# Altium PCB iron_board_PCB.PcbDoc (part 2 of 2)
Units mil, origin at the board's own origin, x right, y up, seen from the top; angles counter-clockwise.
Board outline 1620 x 2202.72 mil, 4 copper layers (Top Layer, Mid Layer 1, Mid Layer 2, Bottom Layer), stack 61.811 mil thick; 72 components, 48 nets, 259 pads, 44 vias.
Unrouted connection lines stored in the file: 114.
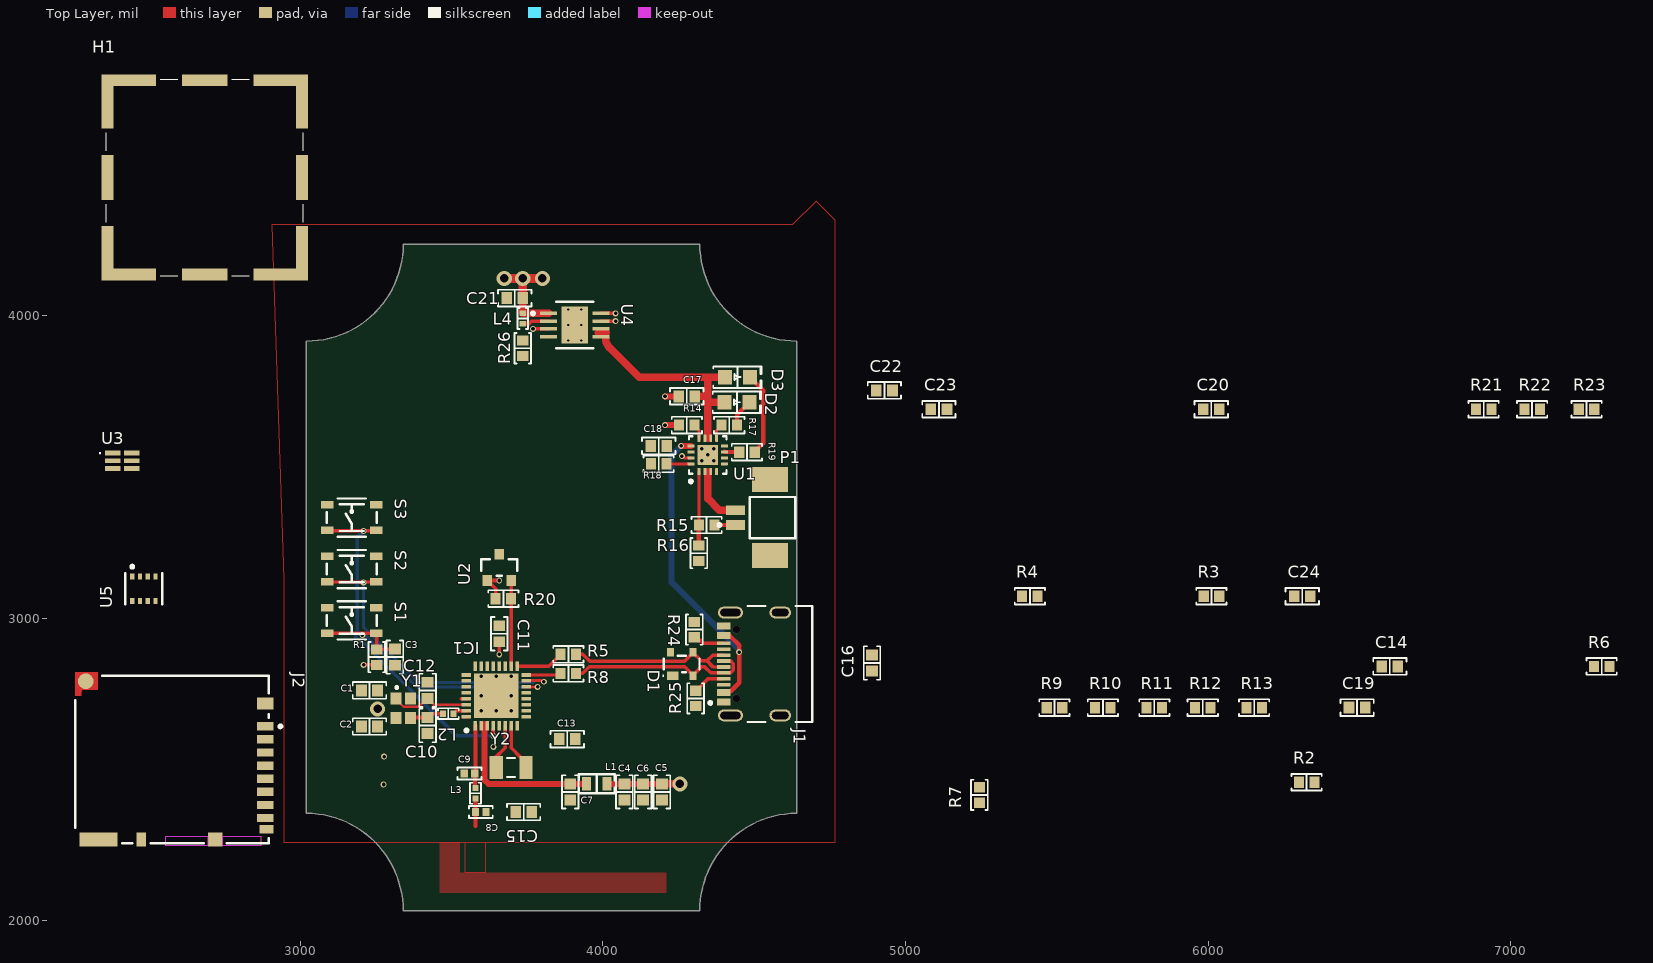
[diagram p0: Top Layer view]

## Via types
v1: diameter 19.68, hole 11.81, Top Layer to Bottom Layer, 33 vias
v2: diameter 19.68, hole 7.87, Top Layer to Bottom Layer, 6 vias
v3: diameter 50, hole 28, Top Layer to Bottom Layer, 5 vias

## Nets (pads, with @x,y where several pads share a name; then routed paths per layer and width w, separated by ;. In a path a pad name is that pad's centre, name@x,y a point inside that pad or via, vN(x,y) a via of type N, cw(c..) or ccw(c..) an arc to the next point about the centre after c; other vN are vias at no path point) (continued)
+4.2: (continued)
  Top Layer w25: 3984.61,3942.59 3985.02,3942.18 4011.28,3942.18 ; 4009.31,3923.2 ccw(c4051.68,3923.2) 4021.7,3893.26 4120,3794.96 4346.35,3794.96 ; C17.2 4346.35,3732.68 ; 4346.35,3594.24 4346.35,3713 ; D2.1 4346.35,3713 ; D3.1 4347.39,3796 4346.35,3794.96 ; 4346.35,3713 4346.35,3732.68 ; 4346.35,3732.68 4346.35,3794.96
CHIP_ENABLE: C14.2 IC1.4 R6.1 S3.3 S3.4 | length 1141.8
  Top Layer w12: S3.3 3089.29,3288.69 3208.39,3288.69 v1(3209.37,3287.71) 3210.35,3288.69 3250.71,3288.69 S3.4 ; v1(3637.58,2610.46) IC1.4@3637.58,2634.72
  Bottom Layer w12: v1(3209.37,3287.71) 3187.62,3265.96 3187.62,2956.72 3183.31,2952.4 3183.31,2934.39 3196.05,2921.65 3204.67,2921.65 3515.86,2610.46 v1(3637.58,2610.46)
GND: C1.1 C2.1 C3.1 C4.2 C5.1 C6.1 C7.1 C8.1 C8.2 C9.1 C10.2 C11.1 C12.2 C13.1 C14.1 C15.2 C16.2 C17.1 C18.1 C19.2 C20.1 C21.2 C22.1 C23.1 C24.1 C24.2 D1.1 IC1.33 J1.1 J1.2 J1.3 J1.4 J1.A1-B12 J1.B1-A12 J2.6 J2.11 J2.12 J2.13 J2.14 L3.1 P1.MP1 P1.MP2 R14.1 R16.1 R18.1 R24.1 R25.1 R26.1 S1.1 S1.2 S2.1 S2.2 S3.1 S3.2 U1.4 U1.6 U1.8 U1.15 U1.17@4346.35,3539.12 U2.3 U3.2 U3.3 U4.3 U4.7 U4.8 U4.9 U5.1 U5.7 Y1.2 Y1.4 | length 402.2
  Top Layer w10: v1(4260.74,3534.69) 4263.36,3534.69 4268.7,3529.35 4291.15,3529.35 U1.15
  Top Layer w11.35: J1.B1-A12@4397.82,2973.22 4408.65,2973.22 J1.B1-A12@4414.78,2979.35 ; J1.2@4400.02,3012.16 4407,3012.16 J1.2@4414.78,3004.37 ; J1.1@4414.78,2682.4 J1.1@4415.02,2682.16
  Top Layer w12: v1(3768.86,3955.23) 3768.94,3955.31 3819.96,3955.31 U4.3 ; U4.7 v1(4041.65,3980.98) ; U4.8 v1(4041.65,4006.57)
  Top Layer w12.8: 3578.86,2312 3578.86,2359.14 L3.1
  Top Layer w20: v1(4205,3637.69) R14.1 ; v1(4205,3732.68) C17.1
  other v1: 3275,2450 3277,2542 3598.21,2693.68 3647.43,2693.68 3696.44,2693.68 3598.21,2742.9 3696.64,2742.9 3598,2807.17 3647,2807.17 3697,2807.17 4326.66,3519.43 4366.03,3519.43 4346.35,3539.12 4326.66,3558.8 4366.03,3558.8
  other v2: 3885,3917 3928.31,3917 3885,3968.18 3928.31,3968.18 3885,4019.36 3928.31,4019.36
GPIO8: C3.2 IC1.14 R1.1 S1.3 S1.4 | length 975.4
  Top Layer w10: IC1.14 v1(3784.33,2772.43)
  Top Layer w12: S1.3 S1.4 3252.68,2948.69 R1.1 3253.17,2896.94 3312.06,2896.94 C3.2 ; v1(3205.06,2943.4) v1@3205.06,2949.68
  Bottom Layer w10: v1(3205.06,2943.4) 3209.37,2947.71 3365.62,2791.46 ; 3365.62,2790.7 3383.9,2772.43 v1(3784.33,2772.43)
GPIO9: IC1.15 S2.3 S2.4 | length 1051.5
  Top Layer w10: S2.3 3089.29,3118.69 3208.39,3118.69 v1(3209.37,3117.71) 3210.35,3118.69 3250.71,3118.69 S2.4 ; IC1.15@3746.32,2791.65 IC1.15 3746.76,2793.02 3775.58,2793.02 3775.74,2793.17 3798.65,2793.17 3802.38,2789.44 v1(3805,2789.44)
  Bottom Layer w10: v1(3209.37,3117.71) 3209.37,2968.43 3391.37,2786.43 3768.99,2786.43 3775.74,2793.17 3801.27,2793.17 v1(3805,2789.44)
INT: IC1.9 R21.1 U3.5
NetC7_2: C7.2 IC1.2 IC1.3 L1.2 | length 527
  Top Layer w20: 3608.06,2644.47 3608.06,2650.48 ; 3609.06,2644.47 3609.06,2464.72 3621.77,2452 C7.2 L1.2
NetC9_2: C9.2 IC1.1 L3.2 | length 195.8
  Top Layer w12.8: C9.2 3577.68,2485.28 3577.68,2439.65 L3.2 ; C9.2@3578.53,2497.62 IC1.1
NetC18_2: C18.2 D1.4 J1.A4-B9 J1.B4-A9 U1.13 | length 1051.6
  Top Layer w14.5: J1.A4-B9 4403.25,2758.23 4422.11,2758.23 4450,2786.12 4450,2910.68 J1.B4-A9@4419.68,2941
  Top Layer w20: v1(4258.28,3568.65) U1.13
  Bottom Layer w20: v1(4258.28,3568.65) 4226.98,3537.35 4226.98,3118.02 4450,2895 v1(4450,2887.53)
NetD2_2: D2.2 R17.2 | length 92.4
  Top Layer w14.5: R17.2 4442.8,3671.66 D2.2
NetD3_2: D3.2 R19.2 | length 277.2
  Top Layer w14.5: D3.2 4529.02,3752.74 4529.02,3577.65 4501.46,3550.09 R19.2
NetIC1_8: IC1.8 U5.3
NetIC1_12: IC1.12 U5.4
NetIC1_13: IC1.13 U5.5
NetIC1_16: IC1.16 R8.1 | length 116.4
  Top Layer w11.48: IC1.16 3854.91,2811.8 R8.1
NetIC1_17: IC1.17 R5.2 | length 169.7
  Top Layer w11.35: IC1.17@3716.32,2851.17 IC1.17 3821.43,2841.32 R5.2
NetIC1_18: IC1.18 R20.2 U2.2 | length 282.7
  Top Layer w12: IC1.18 R20.2 U2.2
NetIC1_21: IC1.21 R4.2
NetIC1_22: IC1.22 U5.2
NetIC1_23: IC1.23 J2.3 R13.1
NetIC1_24: IC1.24 R3.2
NetIC1_25: IC1.25 J2.7 R9.1
NetIC1_26: IC1.26 J2.8 R10.1
NetIC1_27: IC1.27 R2.2
NetIC1_28: IC1.28 J2.2 R12.1
NetIC1_31: IC1.31 L2.1 | length 47.4
  Top Layer w12: L2.1 3506.32,2685.18 3514.83,2693.68 IC1.31
NetJ1_A5: J1.A5 R25.2 | length 108.5
  Top Layer w12: R25.2 4308.25,2759.97 4347.23,2798.94 J1.A5
NetJ1_B5: J1.B5 R24.2 | length 104.7
  Top Layer w12: R24.2 4312.7,2925.61 4322.94,2925.61 4331.49,2917.06 J1.B5
NetJ2_1: J2.1 R2.1 R11.1
NetJ2_5: J2.5 R3.1
NetL4_1: L4.1 U4.2 | length 88.6
  Top Layer w12: L4.1 3735.96,3973.32 3755.57,3973.32 3763.23,3980.98 U4.2
NetP1_1: P1.1 R15.2 | length 69.9
  Top Layer w14.5: R15.2 P1.1
NetP1_2: P1.2 U1.2 U1.3 | length 196.5
  Top Layer w25: 4346.35,3484 4346.35,3395.02 4384.76,3356.61 P1.2
NetR14_2: R14.2 U1.12 | length 49.1
  Top Layer w10: R14.2@4303.2,3637.69 4303.2,3635.72 4316.82,3622.1 U1.12
NetR15_1: R15.1 R16.2 U1.1 | length 244
  Top Layer w10: R15.1 U1.1
  Top Layer w14.5: R16.2 R15.1
NetR17_1: R17.1 U1.9 | length 50
  Top Layer w10: U1.9 4375.87,3619.98 4391.62,3635.72 R17.1
NetR18_2: R18.2 U1.16 | length 81.5
  Top Layer w10: R18.2 U1.16
NetR19_1: R19.1 U1.7 | length 49.2
  Top Layer w14.5: U1.7 4401.88,3548.54 4449.87,3548.54 R19.1
NetR26_2: R26.2 U4.4 | length 6.3
  Top Layer w12: R26.2 R26.2@3739.44,3921.44
RTC_N: C16.1 IC1.7 R7.1 Y2.2 | length 158.7
  Top Layer w12: IC1.7 3696.64,2571.11 3730.2,2537.55 3738.02,2529.72 3745.85,2521.9 Y2.2
RTC_P: C15.1 IC1.6 R7.2 Y2.1 | length 132.5
  Top Layer w12: Y2.1@3631.68,2537.65 3643.49,2537.65 3676.95,2571.11 IC1.6
SCL: IC1.11 R23.1 U3.4
SDA: IC1.10 R22.1 U3.6
USB_N: D1.2 J1.A7 J1.B7 R8.2 | length 597.6
  Top Layer w11.48: R8.2 3933.76,2817 3955.18,2838.42 4269.76,2838.42 4297.43,2810.76 4324.98,2838.32 4336.1,2838.32 4355.68,2818.73 4398.58,2818.73 J1.B7 4398.85,2818.8 4421.48,2818.8 4431.06,2828.38 4431.06,2848.5 4421.32,2858.24
USB_P: D1.3 J1.A6 J1.B6 R5.1 | length 592.6
  Top Layer w11.48: R5.1 3933.76,2880 3955.87,2857.9 4269.76,2857.9 D1.3@4297.43,2885.56 ; D1.3 D1.3@4297.43,2885.56 ; J1.A6 4398.58,2838.21 4363.75,2838.21 4343.72,2858.24 ; J1.B6 4363.17,2877.69 4343.72,2858.24 ; D1.3@4297.43,2885.56 4324.75,2858.24 4343.72,2858.24
VCC33: C1.2 C2.2 C4.1 C5.2 C6.2 C11.2 C13.2 C19.1 C20.2 C21.1 C22.2 C23.2 IC1.5 IC1.20 IC1.29 IC1.32 J2.4 L1.1 L4.2 R1.2 R6.2 R9.2 R10.2 R11.2 R12.2 R13.2 R20.1 R21.2 R22.2 R23.2 U2.1 U3.1 U4.1 U5.6 U5.8 | length 786.6
  Top Layer w12: v1(3209.37,2845.27) 3242.12,2845.27 R1.2@3247.65,2839.73 ; 3532.79,2733.15 3548.91,2733.15 IC1.29 ; IC1.32@3539.35,2674 IC1.32 ; R20.1 3645.46,3096.44 3629.61,3112.28 3627.65,3112.28 3617.9,3122.03 U2.1 v1(3657.27,3124) ; v1(3657.27,2880) C11.2
  Top Layer w20: L1.1 C4.1 C5.2 C6.2
  Top Layer w25: C21.1 L4.2 3819.61,4007 U4.1 ; C6.2 v3(4254.52,2452)
  Top Layer w29.53: v3(3673.98,4122) v3(3735,4122) ; C21.1 v3(3735,4122) ; v3(3800,4122) v3(3735,4122)
  other v1: 3637.58,2574.59
  other v3: 3255.18,2699.97
XTAL_N: C12.1 IC1.30 Y1.1 | length 267.1
  Top Layer w8: Y1.1 3315.99,2732.23 3341.71,2706.51 3390.38,2706.51 3418.35,2734.48 C12.1 3422.28,2734.48 3436,2720.76 3436,2718.8 3441.43,2713.37 IC1.30
XTAL_P: C10.1 L2.2 Y1.3 | length 113.6
  Top Layer w12: Y1.3 3366.41,2671.43 C10.1 3422.28,2671.43 3434.86,2684 L2.2
pads on no net: H1.1 H1.2 H1.3 H1.4 H1.5 H1.6 H1.7 H1.8 H1.9 H1.10 H1.11 H1.12 IC1.19 J1. J1.A8 J1.B8 J2.9 J2.10 R4.1 U1.14 U1.17@4346.35,3539.12

## Polygon pours and split planes (outlines as drawn)
GND on Mid Layer 1 "GND_poly" (solid, shelved, pour order 18): 4605,4260 4605,4000 4670,3935 4645,3910 4645,2260 3100,2260 2985,2375 2985,4250 2995,4260 2985,4250 2995,4260
VCC33 on Mid Layer 2 "VCC_poly" (solid, shelved, pour order 19): 2925,2260 4750,2260 4750,3870 4290,4330 3320,4330 2910,3920 2925,3905
GND on Top Layer "NONET_L-01_P-001" (solid, pour order 16): 3461.05,2158 3461.05,2260 3526.05,2260 3526.05,2158
GND on Top Layer "ANT" (solid, pour order 17): 3461.05,2093 4209.05,2093 4209.05,2158 3461.05,2158
GND on Top Layer "NONET_L-01_P-001" (solid, pour order 22): 3545.55,2158 3545.55,2260 3610.55,2260 3610.55,2158
GND on Top Layer "TOP_gnd" (solid, remove dead copper, shelved, pour order 20): 2944.88,3125.98 2944.88,2260 4767.72,2260 4767.72,4314.96 4704.72,4377.95 4625.98,4299.21 2905.51,4299.21

## Silkscreen, mask and mechanical layers (free items; w line width, h text height)
Mechanical 1:
  lines w10: 3020,2355 cw(c3018.61,2033.67) 3339.95,2032.28